# Altium PCB custom_line_V1.PcbDoc (part 1 of 2)
Units mm, origin at the board's own origin, x right, y up, seen from the top; angles counter-clockwise.
Board outline 111.2 x 38.5 mm, 2 copper layers (Top Layer, Bottom Layer); 243 components, 134 nets, 677 pads, 483 vias.
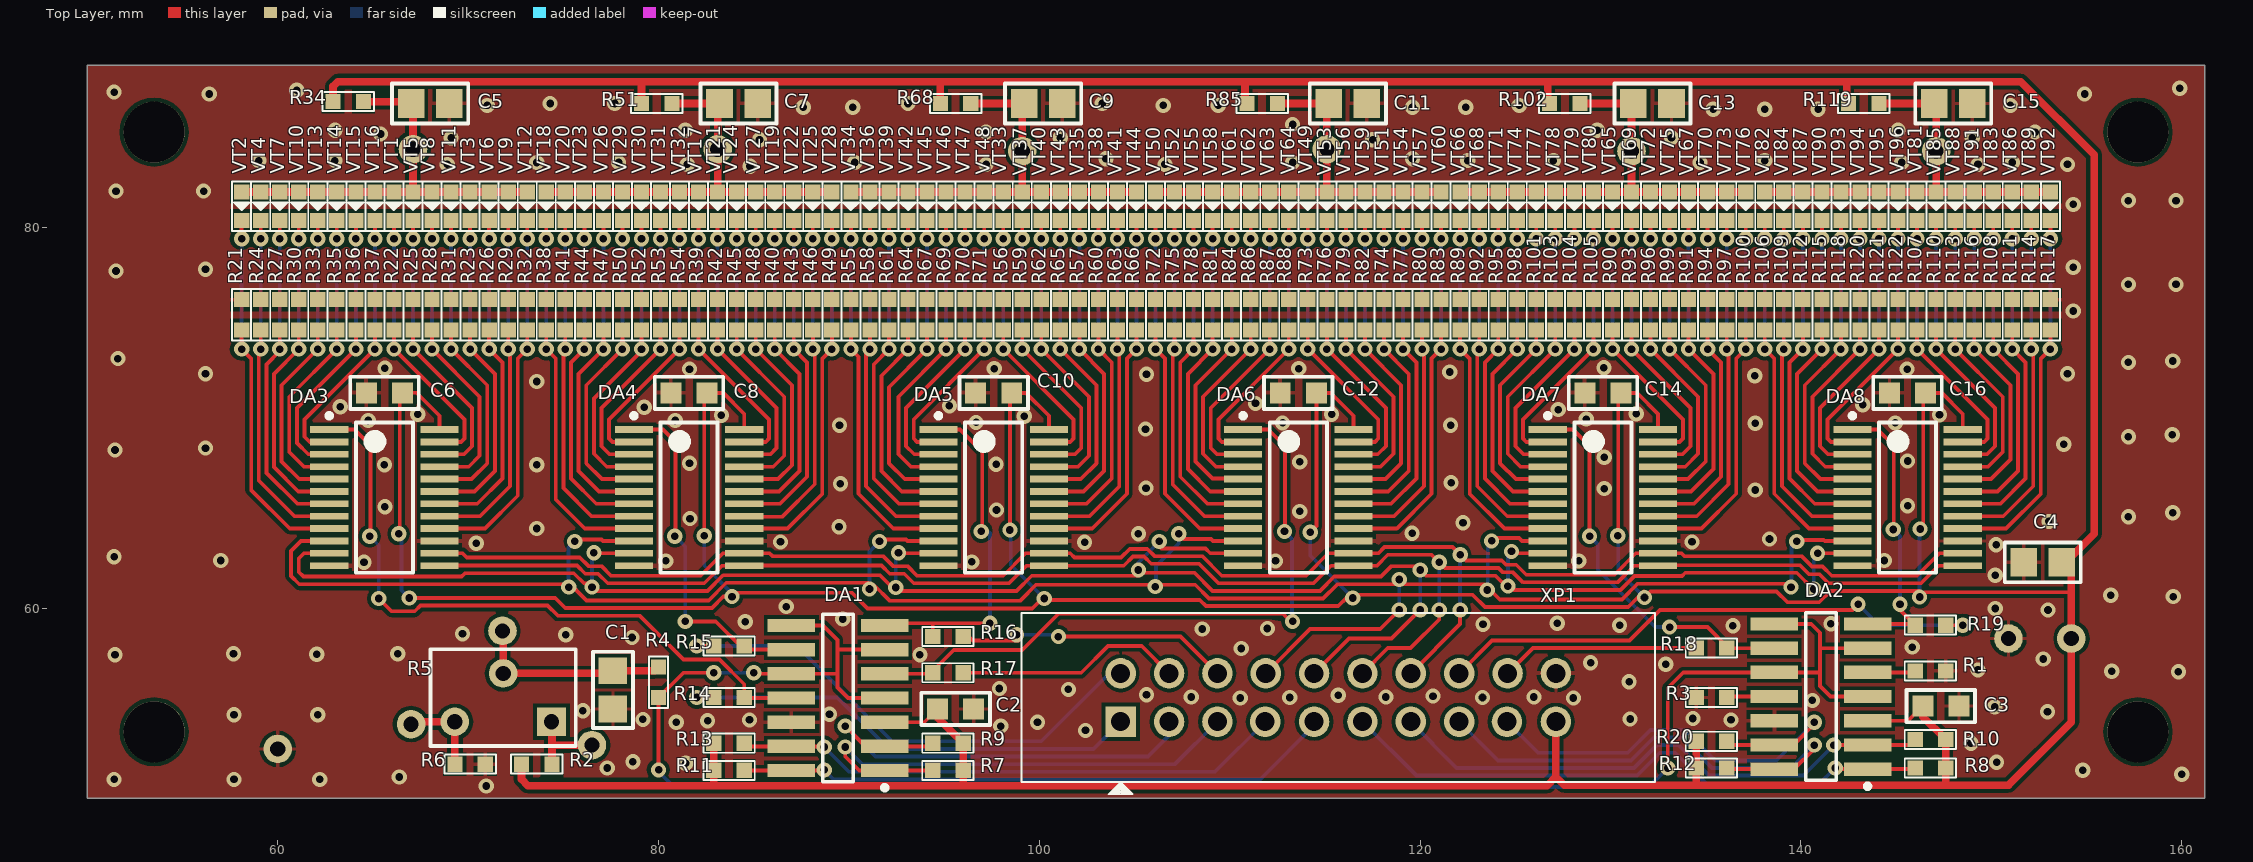
[diagram p0: Top Layer view]
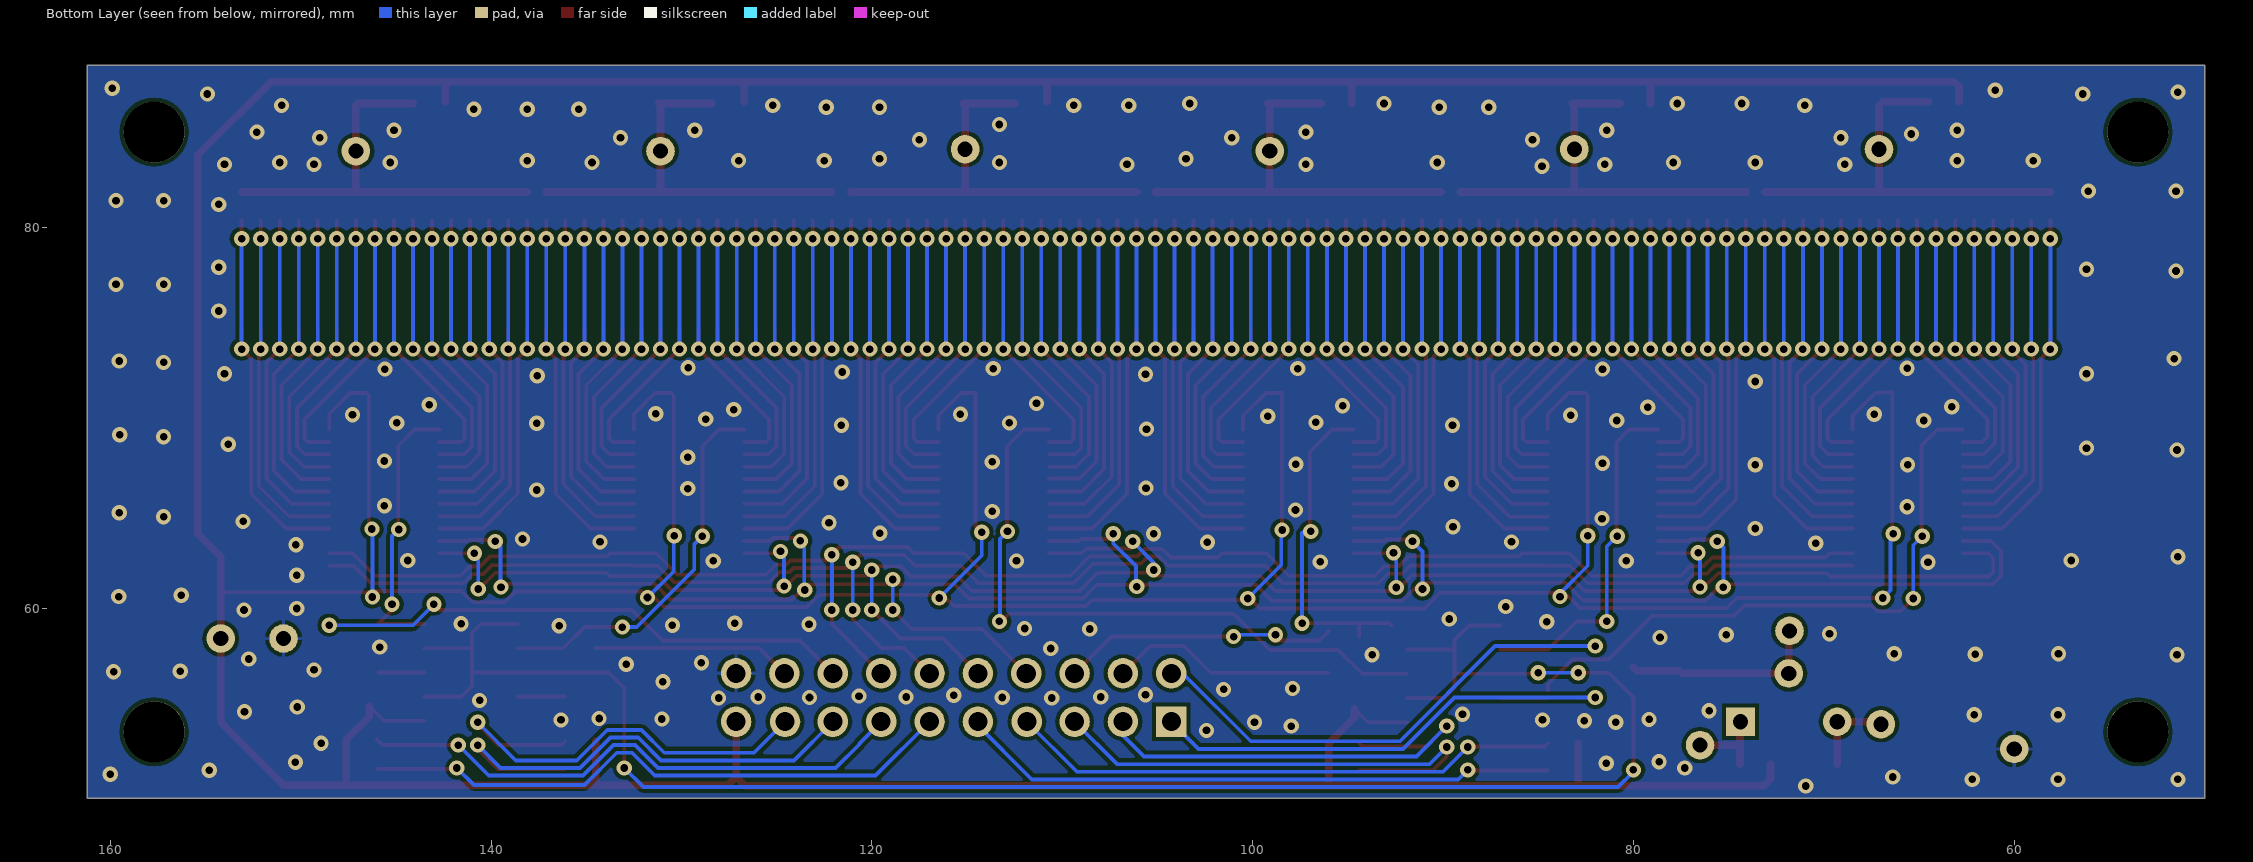
[diagram p1: Bottom Layer view, seen from below]
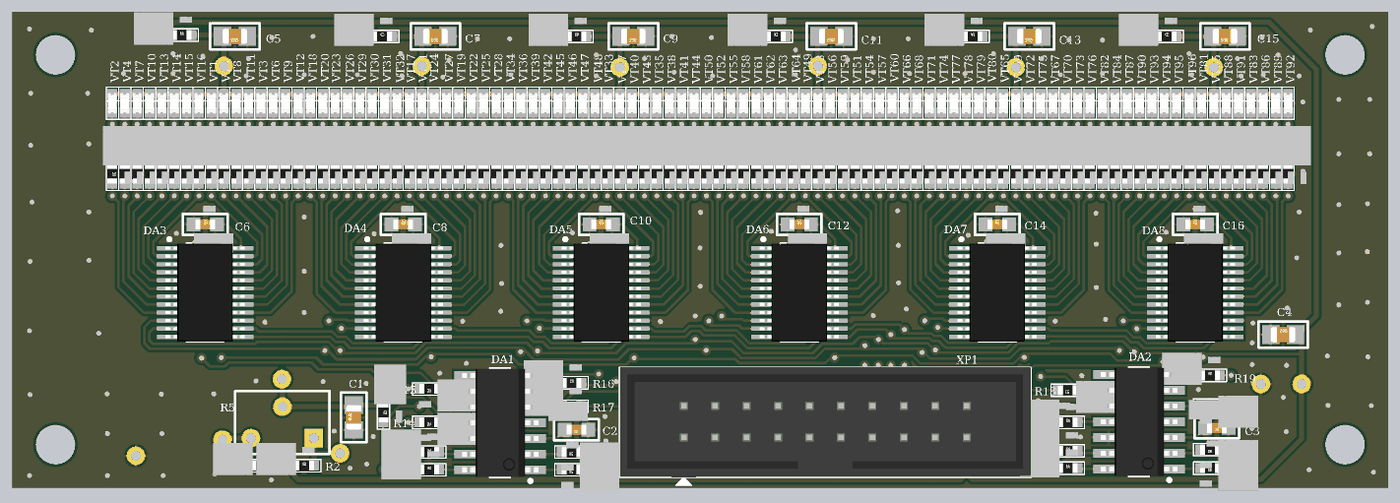
[diagram p3: 3D render of the assembled board from above, using the file's embedded part models]

## Layer stack, top to bottom
Top Layer: signal copper 0.0356
Dielectric: dielectric 0.32, FR-4, Dk 4.8
Bottom Layer: signal copper 0.0356

## Board outline
50,50 161.2,50 161.2,88.5 50,88.5

## Design rules (kind name [scope] priority, off if disabled: settings)
Clearance Clearance_1 [(InPadClass('<Nearby Pads>')) vs InPolygon] p1: gap=0.2
Clearance Clearance_nearby_pads [(InPadClass('<Nearby Pads>'))] p2: gap=0.1
Clearance [All] p3: gap=0.2
ComponentClearance [All] p1 off: gap=0.254 collisioncheckmode=3 verticalgap=0.254 showdistances=FALSE
HoleSize [All] p1: absolutevalues=TRUE maxlimit=4 minlimit=0.3 maxpercent=80.000 minpercent=20.000
HoleToHoleClearance [All] p1: gap=0.2 allowstackedmicrovias=TRUE
MinimumSolderMaskSliver [All] p1: minsoldermaskwidth=0.1
PolygonConnect PolygonConnect_1 [(InPadClass('New Class'))] p1: connectstyle=Relief reliefconductorwidth=0.2 reliefentries=4 polygonreliefangle="90 Angle" airgapwidth=0.2
PolygonConnect [All] p2: connectstyle=Direct reliefconductorwidth=0.2 reliefentries=4 polygonreliefangle="90 Angle" airgapwidth=0.2
RoutingVias [All] p1: holewidth=0.4 width=0.8 viastyle="Through Hole" minholewidth=0.4 minwidth=0.8 maxholewidth=0.4 maxwidth=0.8
SilkToSilkClearance [All] p1 off: silktosilkclearance=0.1
SilkToSolderMaskClearance [IsPad] p1 off: minsilkscreentomaskgap=0.1 clearancetoexposedcopper=TRUE
SolderMaskExpansion [All] p1: expansion=0.02
Width [All] p1: maxlimit=0.6 minlimit=0.2 preferedwidth=0.2
22 further rules are at their usual default settings.

## Classes and differential pairs
component class custom_line_V1_mux6: C15 C16 DA8 R106 R107 R108 R109 R110 R111 R112 R113 R114 R115 R116 R117 R118 R119 R120 R121 R122 VT81 VT82 VT83 VT84 VT85 VT86 VT87 VT88 VT89 VT90 VT91 VT92 VT93 VT94 VT95 VT96
component class custom_line_V1_mux5: 77 C13 C14 DA7 R89 R90 R91 R92 R93 R94 R95 R96 R97 R98 R99 R100 R102 R103 R104 R105 VT65 VT66 VT67 VT68 VT69 VT70 VT71 VT72 VT73 VT74 VT75 VT76 VT77 VT78 VT79 VT80
component class custom_line_V1_comp: C1 C2 C3 C4 DA1 DA2 R1 R2 R3 R4 R5 R6 R7 R8 R9 R10 R11 R12 R13 R14 R15 R16 R17 R18 R19 XP1
component class custom_line_V1_mux1: C5 DA3 R15 R16 R17 R18 R19 R26 R27 R28 R29 R30 R31 R32 R33 R34 R35 R36 R37 VT1 VT2 VT3 VT4 VT5 VT6 VT7 VT8 VT9 VT10 VT11 VT12 VT13 VT14 VT15 VT16
component class custom_line_V1_mux2: C7 C8 DA4 R38 R39 R40 R41 R42 R43 R44 R45 R46 R47 R48 R49 R50 R51 R52 R53 R54 VT17 VT18 VT19 VT20 VT21 VT22 VT23 VT24 VT25 VT26 VT27 VT28 VT29 VT30 VT31 VT32
component class custom_line_V1_mux3: C9 C10 DA5 R55 R56 R57 R58 R59 R60 R61 R62 R63 R64 R65 R66 R67 R68 R69 R70 R71 VT33 VT34 VT35 VT36 VT37 VT38 VT39 VT40 VT41 VT42 VT43 VT44 VT45 VT46 VT47 VT48
component class custom_line_V1_mux4: C11 C12 DA6 R72 R73 R74 R75 R76 R77 R78 R79 R80 R81 R82 R83 R84 R85 R86 R87 R88 VT49 VT50 VT51 VT52 VT53 VT54 VT55 VT56 VT57 VT58 VT59 VT60 VT61 VT62 VT63 VT64
pad class "<Nearby Pads>": R20-1 R20-2 R21-1 R21-2 R22-1 R22-2 R23-1 R23-2 R24-1 R24-2 R25-1 R25-2 R26-1 R26-2 R27-1 R27-2 R28-1 R28-2 R29-1 R29-2 R30-1 R30-2 R31-1 R31-2 R32-1 R32-2 R33-1 R33-2 R34-1 R34-2 R35-1 R35-2 R36-1 R36-2 R37-1 R37-2 R38-1 R38-2 R39-1 R39-2 R40-1 R40-2 R41-1 R41-2 R42-1 R42-2 R43-1 R43-2 R44-1 R44-2 R45-1 R45-2 R46-1 R46-2 R47-1 R47-2 R48-1 R48-2 R49-1 R49-2 R50-1 R50-2 R51-1 R51-2 R52-1 R52-2 R53-1 R53-2 R54-1 R54-2 R55-1 R55-2 R56-1 R56-2 R57-1 R57-2 R58-1 R58-2 R59-1 R59-2 R60-1 R60-2 R61-1 R61-2 R62-1 R62-2 R63-1 R63-2 R64-1 R64-2 R65-1 R65-2 R66-1 R66-2 R67-1 R67-2 R68-1 R68-2 R69-1 R69-2 R70-1 R70-2 R71-1 R71-2 R72-1 R72-2 R73-1 R73-2 R74-1 R74-2 R75-1 R75-2 R76-1 R76-2 R77-1 R77-2 R78-1 R78-2 R79-1 R79-2 R80-1 R80-2 R81-1 R81-2 R82-1 R82-2 R83-1 R83-2 R84-1 R84-2 R85-1 R85-2 R86-1 R86-2 R87-1 R87-2 R88-1 R88-2 R89-1 R89-2 R90-1 R90-2 R91-1 R91-2 R92-1 R92-2 R93-1 R93-2 R94-1 R94-2 R95-1 R95-2 R96-1 R96-2 R97-1 R97-2 R98-1 R98-2 R99-1 R99-2 R100-1 R100-2 R101-1 R101-2 R102-1 R102-2 R103-1 R103-2 R104-1 R104-2 R105-1 R105-2 R106-1 R106-2 R107-1 R107-2 R108-1 R108-2 R109-1 R109-2 R110-1 R110-2 R111-1 R111-2 R112-1 R112-2 R113-1 R113-2 R114-1 R114-2 R115-1 R115-2 R116-1 R116-2 R117-1 R117-2 R118-1 R118-2 R119-1 R119-2 R120-1 R120-2 R121-1 R121-2 R122-1 R122-2 VT1-1 VT1-2 VT2-1 VT2-2 VT3-1 VT3-2 VT4-1 VT4-2 VT5-1 VT5-2 VT6-1 VT6-2 VT7-1 VT7-2 VT8-1 VT8-2 VT9-1 VT9-2 VT10-1 VT10-2 VT11-1 VT11-2 VT12-1 VT12-2 VT13-1 VT13-2 VT14-1 VT14-2 VT15-1 VT15-2 VT16-1 VT16-2 VT17-1 VT17-2 VT18-1 VT18-2 VT19-1 VT19-2 VT20-1 VT20-2 VT21-1 VT21-2 VT22-1 VT22-2 VT23-1 VT23-2 VT24-1 VT24-2 VT25-1 VT25-2 VT26-1 VT26-2 VT27-1 VT27-2 VT28-1 VT28-2 VT29-1 VT29-2 VT30-1 VT30-2 VT31-1 VT31-2 VT32-1 VT32-2 VT33-1 VT33-2 VT34-1 VT34-2 VT35-1 VT35-2 VT36-1 VT36-2 VT37-1 VT37-2 VT38-1 VT38-2 VT39-1 VT39-2 VT40-1 VT40-2 VT41-1 VT41-2 VT42-1 VT42-2 VT43-1 VT43-2 VT44-1 VT44-2 VT45-1 VT45-2 VT46-1 VT46-2 VT47-1 VT47-2 VT48-1 VT48-2 VT49-1 VT49-2 VT50-1 VT50-2 VT51-1 VT51-2 VT52-1 VT52-2 VT53-1 VT53-2 VT54-1 VT54-2 VT55-1 VT55-2 VT56-1 VT56-2 VT57-1 VT57-2 VT58-1 VT58-2 VT59-1 VT59-2 VT60-1 VT60-2 VT61-1 VT61-2 VT62-1 VT62-2 VT63-1 VT63-2 VT64-1 VT64-2 VT65-1 VT65-2 VT66-1 VT66-2 VT67-1 VT67-2 VT68-1 VT68-2 VT69-1 VT69-2 VT70-1 VT70-2 VT71-1 VT71-2 VT72-1 VT72-2 VT73-1 VT73-2 VT74-1 VT74-2 VT75-1 VT75-2 VT76-1 VT76-2 VT77-1 VT77-2 VT78-1 VT78-2 VT79-1 VT79-2 VT80-1 VT80-2 VT81-1 VT81-2 VT82-1 VT82-2 VT83-1 VT83-2 VT84-1 VT84-2 VT85-1 VT85-2 VT86-1 VT86-2 VT87-1 VT87-2 VT88-1 VT88-2 VT89-1 VT89-2 VT90-1 VT90-2 VT91-1 VT91-2 VT92-1 VT92-2 VT93-1 VT93-2 VT94-1 VT94-2 VT95-1 VT95-2 VT96-1 VT96-2
pad class "New Class": C1-1 C1-2 C2-1 C2-2 C3-1 C3-2 C4-1 C4-2 C5-1 C5-2 C6-1 C6-2 C7-1 C7-2 C8-1 C8-2 C9-1 C9-2 C10-1 C10-2 C11-1 C11-2 C12-1 C12-2 C13-1 C13-2 C14-1 C14-2 C15-1 C15-2 C16-1 C16-2 DA1-1 DA1-2 DA1-3 DA1-4 DA1-5 DA1-6 DA1-7 DA1-8 DA1-9 DA1-10 DA1-11 DA1-12 DA1-13 DA1-14 DA2-1 DA2-2 DA2-3 DA2-4 DA2-5 DA2-6 DA2-7 DA2-8 DA2-9 DA2-10 DA2-11 DA2-12 DA2-13 DA2-14 DA3-1 DA3-2 DA3-3 DA3-4 DA3-5 DA3-6 DA3-7 DA3-8 DA3-9 DA3-10 DA3-11 DA3-12 DA3-13 DA3-14 DA3-15 DA3-16 DA3-17 DA3-18 DA3-19 DA3-20 DA3-21 DA3-22 DA3-23 DA3-24 DA4-1 DA4-2 DA4-3 DA4-4 DA4-5 DA4-6 DA4-7 DA4-8 DA4-9 DA4-10 DA4-11 DA4-12 DA4-13 DA4-14 DA4-15 DA4-16 DA4-17 DA4-18 DA4-19 DA4-20 DA4-21 DA4-22 DA4-23 DA4-24 DA5-1 DA5-2 DA5-3 DA5-4 DA5-5 DA5-6 DA5-7 DA5-8 DA5-9 DA5-10 DA5-11 DA5-12 DA5-13 DA5-14 DA5-15 DA5-16 DA5-17 DA5-18 DA5-19 DA5-20 DA5-21 DA5-22 DA5-23 DA5-24 DA6-1 DA6-2 DA6-3 DA6-4 DA6-5 DA6-6 DA6-7 DA6-8 DA6-9 DA6-10 DA6-11 DA6-12 DA6-13 DA6-14 DA6-15 DA6-16 DA6-17 DA6-18 DA6-19 DA6-20 DA6-21 DA6-22 DA6-23 DA6-24 DA7-1 DA7-2 DA7-3 DA7-4 DA7-5 DA7-6 DA7-7 DA7-8 DA7-9 DA7-10 DA7-11 DA7-12 DA7-13 DA7-14 DA7-15 DA7-16 DA7-17 DA7-18 DA7-19 DA7-20 DA7-21 DA7-22 DA7-23 DA7-24 DA8-1 DA8-2 DA8-3 DA8-4 DA8-5 DA8-6 DA8-7 DA8-8 DA8-9 DA8-10 DA8-11 DA8-12 DA8-13 DA8-14 DA8-15 DA8-16 DA8-17 DA8-18 DA8-19 DA8-20 DA8-21 DA8-22 DA8-23 DA8-24 Free-0 Free-1 Free-2 Free-3 Free-4 Free-5 Free-6 Free-7 Free-8 Free-11 Free-12 Free-13 Free-M0 Free-M1 Free-M2 Free-M3 R1-1 R1-2 R2-1 R2-2 R3-1 R3-2 R4-1 R4-2 R5-1 R5-2 R5-3 R6-1 R6-2 R7-1 R7-2 R8-1 R8-2 R9-1 R9-2 R10-1 R10-2 R11-1 R11-2 R12-1 R12-2 R13-1 R13-2 R14-1 R14-2 R15-1 R15-2 R16-1 R16-2 R17-1 R17-2 R18-1 R18-2 R19-1 R19-2 R20-1 R20-2 R21-1 R21-2 R22-1 R22-2 R23-1 R23-2 R24-1 R24-2 R25-1 R25-2 R26-1 R26-2 R27-1 R27-2 R28-1 R28-2 R29-1 R29-2 R30-1 R30-2 R31-1 R31-2 R32-1 R32-2 R33-1 R33-2 R34-1 R34-2 R35-1 R35-2 R36-1 R36-2 R37-1 R37-2 R38-1 R38-2 R39-1 R39-2 R40-1 R40-2 R41-1 R41-2 R42-1 R42-2 R43-1 R43-2 R44-1 R44-2 R45-1 R45-2 R46-1 R46-2 R47-1 R47-2 R48-1 R48-2 R49-1 R49-2 R50-1 R50-2 R51-1 R51-2 R52-1 R52-2 R53-1 R53-2 R54-1 R54-2 R55-1 R55-2 R56-1 R56-2 R57-1 R57-2 R58-1 R58-2 R59-1 R59-2 R60-1 R60-2 R61-1 R61-2 R62-1 R62-2 R63-1 R63-2 R64-1 R64-2 R65-1 R65-2 R66-1 R66-2 R67-1 R67-2 R68-1 R68-2 R69-1 R69-2 R70-1 R70-2 R71-1 R71-2 R72-1 R72-2 R73-1 R73-2 R74-1 R74-2 R75-1 R75-2 R76-1 R76-2 R77-1 R77-2 R78-1 R78-2 R79-1 R79-2 R80-1 R80-2 R81-1 R81-2 R82-1 R82-2 R83-1 R83-2 R84-1 R84-2 R85-1 R85-2 R86-1 R86-2 R87-1 R87-2 R88-1 R88-2 R89-1 R89-2 R90-1 R90-2 R91-1 R91-2 R92-1 R92-2 R93-1 R93-2 R94-1 R94-2 R95-1 R95-2 R96-1 R96-2 R97-1 R97-2 R98-1 R98-2 R99-1 R99-2 R100-1 R100-2 R101-1 R101-2 R102-1 R102-2 R103-1 R103-2 R104-1 R104-2 R105-1 R105-2 R106-1 R106-2 R107-1 R107-2 R108-1 R108-2 R109-1 R109-2 R110-1 R110-2 R111-1 R111-2 R112-1 R112-2 R113-1 R113-2 R114-1 R114-2 R115-1 R115-2 R116-1 R116-2 R117-1 R117-2 R118-1 R118-2 R119-1 R119-2 R120-1 R120-2 R121-1 R121-2 R122-1 R122-2 VT1-1 VT1-2 VT2-1 VT2-2 VT3-1 VT3-2 VT4-1 VT4-2 VT5-1 VT5-2 VT6-1 VT6-2 VT7-1 VT7-2 VT8-1 VT8-2 VT9-1 VT9-2 VT10-1 VT10-2 VT11-1 VT11-2 VT12-1 VT12-2 VT13-1 VT13-2 VT14-1 VT14-2 VT15-1 VT15-2 VT16-1 VT16-2 VT17-1 VT17-2 VT18-1 VT18-2 VT19-1 VT19-2 VT20-1 VT20-2 VT21-1 VT21-2 VT22-1 VT22-2 VT23-1 VT23-2 VT24-1 VT24-2 VT25-1 VT25-2 VT26-1 VT26-2 VT27-1 VT27-2 VT28-1 VT28-2 VT29-1 VT29-2 VT30-1 VT30-2 VT31-1 VT31-2 VT32-1 VT32-2 VT33-1 VT33-2 VT34-1 VT34-2 VT35-1 VT35-2 VT36-1 VT36-2 VT37-1 VT37-2 VT38-1 VT38-2 VT39-1 VT39-2 VT40-1 VT40-2 VT41-1 VT41-2 VT42-1 VT42-2 VT43-1 VT43-2 VT44-1 VT44-2 VT45-1 VT45-2 VT46-1 VT46-2 VT47-1 VT47-2 VT48-1 VT48-2 VT49-1 VT49-2 VT50-1 VT50-2 VT51-1 VT51-2 VT52-1 VT52-2 VT53-1 VT53-2 VT54-1 VT54-2 VT55-1 VT55-2 VT56-1 VT56-2 VT57-1 VT57-2 VT58-1 VT58-2 VT59-1 VT59-2 VT60-1 VT60-2 VT61-1 VT61-2 VT62-1 VT62-2 VT63-1 VT63-2 VT64-1 VT64-2 VT65-1 VT65-2 VT66-1 VT66-2 VT67-1 VT67-2 VT68-1 VT68-2 VT69-1 VT69-2 VT70-1 VT70-2 VT71-1 VT71-2 VT72-1 VT72-2 VT73-1 VT73-2 VT74-1 VT74-2 VT75-1 VT75-2 VT76-1 VT76-2 VT77-1 VT77-2 VT78-1 VT78-2 VT79-1 VT79-2 VT80-1 VT80-2 VT81-1 VT81-2 VT82-1 VT82-2 VT83-1 VT83-2 VT84-1 VT84-2 VT85-1 VT85-2 VT86-1 VT86-2 VT87-1 VT87-2 VT88-1 VT88-2 VT89-1 VT89-2 VT90-1 VT90-2 VT91-1 VT91-2 VT92-1 VT92-2 VT93-1 VT93-2 VT94-1 VT94-2 VT95-1 VT95-2 VT96-1 VT96-2 XP1-1 XP1-2 XP1-3 XP1-4 XP1-5 XP1-6 XP1-7 XP1-8 XP1-9 XP1-10 XP1-11 XP1-12 XP1-13 XP1-14 XP1-15 XP1-16 XP1-17 XP1-18 XP1-19 XP1-20

## Components (designator, comment, footprint, x,y, rotation, side; value= is the part's Value field where it differs from the comment)
C1 "10" CC_0805 77.6,55.7 r90 top
C2 "0.1" CC_0603 95.6,54.7 r180 top
C3 "0.1" CC_0603 147.35,54.85 r180 top
C4 "10" CC_0805 152.7,62.4 r0 top
C5 "10" CC_0805 68,86.5 r180 top
C6 "0.1" CC_0603 65.6,71.3 r0 top
C7 "10" CC_0805 84.2,86.5 r180 top
C8 "0.1" CC_0603 81.6,71.3 r0 top
C9 "10" CC_0805 100.2,86.5 r180 top
C10 "0.1" CC_0603 97.6,71.3 r0 top
C11 "10" CC_0805 116.2,86.5 r180 top
C12 "0.1" CC_0603 113.6,71.3 r0 top
C13 "10" CC_0805 132.2,86.5 r180 top
C14 "0.1" CC_0603 129.6,71.3 r0 top
C15 "10" CC_0805 148,86.5 r180 top
C16 "0.1" CC_0603 145.6,71.3 r0 top
DA1 "TLC374CD" SOIC-14 89.425,55.275 r180 top
DA2 "TLC374CD" SOIC-14 141.05,55.35 r180 top
DA3 "74HC4067PW" TSSOP-24 65.6,65.8 r0 top
DA4 "74HC4067PW" TSSOP-24 81.6,65.8 r0 top
DA5 "74HC4067PW" TSSOP-24 97.6,65.8 r0 top
DA6 "74HC4067PW" TSSOP-24 113.6,65.8 r0 top
DA7 "74HC4067PW" TSSOP-24 129.6,65.8 r0 top
DA8 "74HC4067PW" TSSOP-24 145.6,65.8 r0 top
R1 "10K" RC_0603_SMALL 146.8,56.7 r180 top
R2 "1K" RC_0603_SMALL 73.6,51.8 r0 top
R3 "10K" RC_0603_SMALL 135.3,55.3 r0 top
R4 "10K" RC_0603_SMALL 80,56.1 r270 top
R5 "10K" Res_3266W 74.375,54.025 r180 top
R6 "1K" RC_0603_SMALL 70.1,51.8 r0 top
R7 "10K" RC_0603_SMALL 95.2,51.475 r180 top
R8 "10K" RC_0603_SMALL 146.8,51.6 r180 top
R9 "10K" RC_0603_SMALL 95.2,52.9 r180 top
R10 "10K" RC_0603_SMALL 146.8,53.1 r180 top
R11 "10K" RC_0603_SMALL 83.7,51.475 r0 top
R12 "10K" RC_0603_SMALL 135.3,51.6 r0 top
R13 "10K" RC_0603_SMALL 83.7,52.9 r0 top
R14 "0" RC_0603_SMALL 83.7,55.3 r180 top
R15 "0" RC_0603_SMALL 83.7,58 r180 top
R16 "0" RC_0603_SMALL 95.2,58.5 r0 top
R17 "0" RC_0603_SMALL 95.2,56.6 r0 top
R18 "0" RC_0603_SMALL 135.3,57.9 r180 top
R19 "0" RC_0603_SMALL 146.8,59.1 r0 top
R20 "10K" RC_0603_SMALL 135.3,53 r0 top
R21 "1.8K" RC_0603_SMALL 58.1,75.4 r270 top
R22 "1.8K" RC_0603_SMALL 66.1,75.4 r270 top
R23 "1.8K" RC_0603_SMALL 70.1,75.4 r270 top
R24 "1.8K" RC_0603_SMALL 59.1,75.4 r270 top
R25 "1.8K" RC_0603_SMALL 67.1,75.4 r270 top
R26 "1.8K" RC_0603_SMALL 71.1,75.4 r270 top
R27 "1.8K" RC_0603_SMALL 60.1,75.4 r270 top
R28 "1.8K" RC_0603_SMALL 68.1,75.4 r270 top
R29 "1.8K" RC_0603_SMALL 72.1,75.4 r270 top
R30 "1.8K" RC_0603_SMALL 61.1,75.4 r270 top
R31 "1.8K" RC_0603_SMALL 69.1,75.4 r270 top
R32 "1.8K" RC_0603_SMALL 73.1,75.4 r270 top
R33 "1.8K" RC_0603_SMALL 62.1,75.4 r270 top
R34 "10" RC_0603_SMALL 63.7,86.6 r0 top
R35 "1.8K" RC_0603_SMALL 63.1,75.4 r270 top
R36 "1.8K" RC_0603_SMALL 64.1,75.4 r270 top
R37 "1.8K" RC_0603_SMALL 65.1,75.4 r270 top
R38 "1.8K" RC_0603_SMALL 74.1,75.4 r270 top
R39 "1.8K" RC_0603_SMALL 82.1,75.4 r270 top
R40 "1.8K" RC_0603_SMALL 86.1,75.4 r270 top
R41 "1.8K" RC_0603_SMALL 75.1,75.4 r270 top
R42 "1.8K" RC_0603_SMALL 83.1,75.4 r270 top
R43 "1.8K" RC_0603_SMALL 87.1,75.4 r270 top
R44 "1.8K" RC_0603_SMALL 76.1,75.4 r270 top
R45 "1.8K" RC_0603_SMALL 84.1,75.4 r270 top
R46 "1.8K" RC_0603_SMALL 88.1,75.4 r270 top
R47 "1.8K" RC_0603_SMALL 77.1,75.4 r270 top
R48 "1.8K" RC_0603_SMALL 85.1,75.4 r270 top
R49 "1.8K" RC_0603_SMALL 89.1,75.4 r270 top
R50 "1.8K" RC_0603_SMALL 78.1,75.4 r270 top
R51 "10" RC_0603_SMALL 79.9,86.5 r0 top
R52 "1.8K" RC_0603_SMALL 79.1,75.4 r270 top
R53 "1.8K" RC_0603_SMALL 80.1,75.4 r270 top
R54 "1.8K" RC_0603_SMALL 81.1,75.4 r270 top
R55 "1.8K" RC_0603_SMALL 90.1,75.4 r270 top
R56 "1.8K" RC_0603_SMALL 98.1,75.4 r270 top
R57 "1.8K" RC_0603_SMALL 102.1,75.4 r270 top
R58 "1.8K" RC_0603_SMALL 91.1,75.4 r270 top
R59 "1.8K" RC_0603_SMALL 99.1,75.4 r270 top
R60 "1.8K" RC_0603_SMALL 103.1,75.4 r270 top
R61 "1.8K" RC_0603_SMALL 92.1,75.4 r270 top
R62 "1.8K" RC_0603_SMALL 100.1,75.4 r270 top
R63 "1.8K" RC_0603_SMALL 104.1,75.4 r270 top
R64 "1.8K" RC_0603_SMALL 93.1,75.4 r270 top
R65 "1.8K" RC_0603_SMALL 101.1,75.4 r270 top
R66 "1.8K" RC_0603_SMALL 105.1,75.4 r270 top
R67 "1.8K" RC_0603_SMALL 94.1,75.4 r270 top
R68 "10" RC_0603_SMALL 95.6,86.5 r0 top
R69 "1.8K" RC_0603_SMALL 95.1,75.4 r270 top
R70 "1.8K" RC_0603_SMALL 96.1,75.4 r270 top
R71 "1.8K" RC_0603_SMALL 97.1,75.4 r270 top
R72 "1.8K" RC_0603_SMALL 106.1,75.4 r270 top
R73 "1.8K" RC_0603_SMALL 114.1,75.4 r270 top
R74 "1.8K" RC_0603_SMALL 118.1,75.4 r270 top
R75 "1.8K" RC_0603_SMALL 107.1,75.4 r270 top
R76 "1.8K" RC_0603_SMALL 115.1,75.4 r270 top
R77 "1.8K" RC_0603_SMALL 119.1,75.4 r270 top
R78 "1.8K" RC_0603_SMALL 108.1,75.4 r270 top
R79 "1.8K" RC_0603_SMALL 116.1,75.4 r270 top
R80 "1.8K" RC_0603_SMALL 120.1,75.4 r270 top
R81 "1.8K" RC_0603_SMALL 109.1,75.4 r270 top
R82 "1.8K" RC_0603_SMALL 117.1,75.4 r270 top
R83 "1.8K" RC_0603_SMALL 121.1,75.4 r270 top
R84 "1.8K" RC_0603_SMALL 110.1,75.4 r270 top
R85 "10" RC_0603_SMALL 111.7,86.5 r0 top
R86 "1.8K" RC_0603_SMALL 111.1,75.4 r270 top
R87 "1.8K" RC_0603_SMALL 112.1,75.4 r270 top
R88 "1.8K" RC_0603_SMALL 113.1,75.4 r270 top
R89 "1.8K" RC_0603_SMALL 122.1,75.4 r270 top
R90 "1.8K" RC_0603_SMALL 130.1,75.4 r270 top
R91 "1.8K" RC_0603_SMALL 134.1,75.4 r270 top
R92 "1.8K" RC_0603_SMALL 123.1,75.4 r270 top
R93 "1.8K" RC_0603_SMALL 131.1,75.4 r270 top
R94 "1.8K" RC_0603_SMALL 135.1,75.4 r270 top
R95 "1.8K" RC_0603_SMALL 124.1,75.4 r270 top
R96 "1.8K" RC_0603_SMALL 132.1,75.4 r270 top
R97 "1.8K" RC_0603_SMALL 136.1,75.4 r270 top
R98 "1.8K" RC_0603_SMALL 125.1,75.4 r270 top
R99 "1.8K" RC_0603_SMALL 133.1,75.4 r270 top
R100 "1.8K" RC_0603_SMALL 137.1,75.4 r270 top
R101 "1.8K" RC_0603_SMALL 126.1,75.4 r270 top
R102 "10" RC_0603_SMALL 127.6,86.5 r0 top
R103 "1.8K" RC_0603_SMALL 127.1,75.4 r270 top
R104 "1.8K" RC_0603_SMALL 128.1,75.4 r270 top
R105 "1.8K" RC_0603_SMALL 129.1,75.4 r270 top
R106 "1.8K" RC_0603_SMALL 138.1,75.4 r270 top
R107 "1.8K" RC_0603_SMALL 146.1,75.4 r270 top
R108 "1.8K" RC_0603_SMALL 150.1,75.4 r270 top
R109 "1.8K" RC_0603_SMALL 139.1,75.4 r270 top
R110 "1.8K" RC_0603_SMALL 147.1,75.4 r270 top
R111 "1.8K" RC_0603_SMALL 151.1,75.4 r270 top
R112 "1.8K" RC_0603_SMALL 140.1,75.4 r270 top
R113 "1.8K" RC_0603_SMALL 148.1,75.4 r270 top
R114 "1.8K" RC_0603_SMALL 152.1,75.4 r270 top
R115 "1.8K" RC_0603_SMALL 141.1,75.4 r270 top
R116 "1.8K" RC_0603_SMALL 149.1,75.4 r270 top
R117 "1.8K" RC_0603_SMALL 153.1,75.4 r270 top
R118 "1.8K" RC_0603_SMALL 142.1,75.4 r270 top
R119 "10" RC_0603_SMALL 143.3,86.5 r0 top
R120 "1.8K" RC_0603_SMALL 143.1,75.4 r270 top
R121 "1.8K" RC_0603_SMALL 144.1,75.4 r270 top
R122 "1.8K" RC_0603_SMALL 145.1,75.4 r270 top
VT1 "IN-S63DTPT" LED_0603 66.1,81.1 r270 top
VT2 "IN-S63DTPT" LED_0603 58.1,81.1 r270 top
VT3 "IN-S63DTPT" LED_0603 70.1,81.1 r270 top
VT4 "IN-S63DTPT" LED_0603 59.1,81.1 r270 top
VT5 "IN-S63DTPT" LED_0603 67.1,81.1 r270 top
VT6 "IN-S63DTPT" LED_0603 71.1,81.1 r270 top
VT7 "IN-S63DTPT" LED_0603 60.1,81.1 r270 top
VT8 "IN-S63DTPT" LED_0603 68.1,81.1 r270 top
VT9 "IN-S63DTPT" LED_0603 72.1,81.1 r270 top
VT10 "IN-S63DTPT" LED_0603 61.1,81.1 r270 top
VT11 "IN-S63DTPT" LED_0603 69.1,81.1 r270 top
VT12 "IN-S63DTPT" LED_0603 73.1,81.1 r270 top
VT13 "IN-S63DTPT" LED_0603 62.1,81.1 r270 top
VT14 "IN-S63DTPT" LED_0603 63.1,81.1 r270 top
VT15 "IN-S63DTPT" LED_0603 64.1,81.1 r270 top
VT16 "IN-S63DTPT" LED_0603 65.1,81.1 r270 top
VT17 "IN-S63DTPT" LED_0603 82.1,81.1 r270 top
VT18 "IN-S63DTPT" LED_0603 74.1,81.1 r270 top
VT19 "IN-S63DTPT" LED_0603 86.1,81.1 r270 top
VT20 "IN-S63DTPT" LED_0603 75.1,81.1 r270 top
VT21 "IN-S63DTPT" LED_0603 83.1,81.1 r270 top
VT22 "IN-S63DTPT" LED_0603 87.1,81.1 r270 top
VT23 "IN-S63DTPT" LED_0603 76.1,81.1 r270 top
VT24 "IN-S63DTPT" LED_0603 84.1,81.1 r270 top
VT25 "IN-S63DTPT" LED_0603 88.1,81.1 r270 top
VT26 "IN-S63DTPT" LED_0603 77.1,81.1 r270 top
VT27 "IN-S63DTPT" LED_0603 85.1,81.1 r270 top
VT28 "IN-S63DTPT" LED_0603 89.1,81.1 r270 top
VT29 "IN-S63DTPT" LED_0603 78.1,81.1 r270 top
VT30 "IN-S63DTPT" LED_0603 79.1,81.1 r270 top
VT31 "IN-S63DTPT" LED_0603 80.1,81.1 r270 top
VT32 "IN-S63DTPT" LED_0603 81.1,81.1 r270 top
VT33 "IN-S63DTPT" LED_0603 98.1,81.1 r270 top
VT34 "IN-S63DTPT" LED_0603 90.1,81.1 r270 top
VT35 "IN-S63DTPT" LED_0603 102.1,81.1 r270 top
VT36 "IN-S63DTPT" LED_0603 91.1,81.1 r270 top
VT37 "IN-S63DTPT" LED_0603 99.1,81.1 r270 top
VT38 "IN-S63DTPT" LED_0603 103.1,81.1 r270 top
VT39 "IN-S63DTPT" LED_0603 92.1,81.1 r270 top
VT40 "IN-S63DTPT" LED_0603 100.1,81.1 r270 top
VT41 "IN-S63DTPT" LED_0603 104.1,81.1 r270 top
VT42 "IN-S63DTPT" LED_0603 93.1,81.1 r270 top
VT43 "IN-S63DTPT" LED_0603 101.1,81.1 r270 top
VT44 "IN-S63DTPT" LED_0603 105.1,81.1 r270 top
VT45 "IN-S63DTPT" LED_0603 94.1,81.1 r270 top
VT46 "IN-S63DTPT" LED_0603 95.1,81.1 r270 top
VT47 "IN-S63DTPT" LED_0603 96.1,81.1 r270 top
VT48 "IN-S63DTPT" LED_0603 97.1,81.1 r270 top
VT49 "IN-S63DTPT" LED_0603 114.1,81.1 r270 top
VT50 "IN-S63DTPT" LED_0603 106.1,81.1 r270 top
VT51 "IN-S63DTPT" LED_0603 118.1,81.1 r270 top
VT52 "IN-S63DTPT" LED_0603 107.1,81.1 r270 top
VT53 "IN-S63DTPT" LED_0603 115.1,81.1 r270 top
VT54 "IN-S63DTPT" LED_0603 119.1,81.1 r270 top
VT55 "IN-S63DTPT" LED_0603 108.1,81.1 r270 top
VT56 "IN-S63DTPT" LED_0603 116.1,81.1 r270 top
VT57 "IN-S63DTPT" LED_0603 120.1,81.1 r270 top
VT58 "IN-S63DTPT" LED_0603 109.1,81.1 r270 top
VT59 "IN-S63DTPT" LED_0603 117.1,81.1 r270 top
VT60 "IN-S63DTPT" LED_0603 121.1,81.1 r270 top
VT61 "IN-S63DTPT" LED_0603 110.1,81.1 r270 top
VT62 "IN-S63DTPT" LED_0603 111.1,81.1 r270 top
VT63 "IN-S63DTPT" LED_0603 112.1,81.1 r270 top
VT64 "IN-S63DTPT" LED_0603 113.1,81.1 r270 top
VT65 "IN-S63DTPT" LED_0603 130.1,81.1 r270 top
VT66 "IN-S63DTPT" LED_0603 122.1,81.1 r270 top
VT67 "IN-S63DTPT" LED_0603 134.1,81.1 r270 top
VT68 "IN-S63DTPT" LED_0603 123.1,81.1 r270 top
VT69 "IN-S63DTPT" LED_0603 131.1,81.1 r270 top
VT70 "IN-S63DTPT" LED_0603 135.1,81.1 r270 top
VT71 "IN-S63DTPT" LED_0603 124.1,81.1 r270 top
VT72 "IN-S63DTPT" LED_0603 132.1,81.1 r270 top
VT73 "IN-S63DTPT" LED_0603 136.1,81.1 r270 top
VT74 "IN-S63DTPT" LED_0603 125.1,81.1 r270 top
VT75 "IN-S63DTPT" LED_0603 133.1,81.1 r270 top
VT76 "IN-S63DTPT" LED_0603 137.1,81.1 r270 top
VT77 "IN-S63DTPT" LED_0603 126.1,81.1 r270 top
VT78 "IN-S63DTPT" LED_0603 127.1,81.1 r270 top
VT79 "IN-S63DTPT" LED_0603 128.1,81.1 r270 top
VT80 "IN-S63DTPT" LED_0603 129.1,81.1 r270 top
VT81 "IN-S63DTPT" LED_0603 146.1,81.1 r270 top
VT82 "IN-S63DTPT" LED_0603 138.1,81.1 r270 top
VT83 "IN-S63DTPT" LED_0603 150.1,81.1 r270 top
VT84 "IN-S63DTPT" LED_0603 139.1,81.1 r270 top
VT85 "IN-S63DTPT" LED_0603 147.1,81.1 r270 top
VT86 "IN-S63DTPT" LED_0603 151.1,81.1 r270 top
VT87 "IN-S63DTPT" LED_0603 140.1,81.1 r270 top
VT88 "IN-S63DTPT" LED_0603 148.1,81.1 r270 top
VT89 "IN-S63DTPT" LED_0603 152.1,81.1 r270 top
VT90 "IN-S63DTPT" LED_0603 141.1,81.1 r270 top
VT91 "IN-S63DTPT" LED_0603 149.1,81.1 r270 top
VT92 "IN-S63DTPT" LED_0603 153.1,81.1 r270 top
VT93 "IN-S63DTPT" LED_0603 142.1,81.1 r270 top
VT94 "IN-S63DTPT" LED_0603 143.1,81.1 r270 top
VT95 "IN-S63DTPT" LED_0603 144.1,81.1 r270 top
VT96 "IN-S63DTPT" LED_0603 145.1,81.1 r270 top
XP1 "IDC-20SM" IDC-20SM 115.7,55.3 r0 top

## Footprints (in the part's own frame and the unit in brackets; to place one, negate y for a bottom-side part, rotate by r counter-clockwise, add the part's x,y. Pads: shape width x height; smd on the part's side, far side on the other; paste and mask are expansions set on the pad)
CC_0603 [mm]
  rect 1.1x1.1 smd: 1(-0.95,0) 2(0.95,0)
  silkscreen extent -1.8,-0.85 1.8,0.85, body extent -0.8,-1.57 0.8,1.27, height 0.3
CC_0805 [mm]
  rect 1.4x1.5 smd: 1(-1,0) 2(1,0)
  silkscreen extent -2,-1.05 2,1.05, body extent -1,-0.63 1,0.62, height 0.78
IDC-20SM [mm]
  rect 1.6x1.6 hole 1: 1(-11.43,-1.27)
  round 1.6 hole 1: 2(-11.43,1.27) 3(-8.89,-1.27) 4(-8.89,1.27) 5(-6.35,-1.27) 6(-6.35,1.27) 7(-3.84,-1.27) 8(-3.81,1.27) 9(-1.27,-1.27) 10(-1.27,1.27) 11(1.27,-1.27) 12(1.27,1.27) 13(3.81,-1.27) 14(3.81,1.27) 15(6.35,-1.27) 16(6.35,1.27) 17(8.86,-1.27) 18(8.89,1.27) 19(11.43,-1.27) 20(11.43,1.27)
  silkscreen extent -16.64,-5.08 16.64,4.44, body extent -16.6,-4.44 16.6,4.45, height 9
LED_0603 [mm]
  rect 0.8x0.8 smd: 1(-0.75,0) 2(0.75,0)
  silkscreen extent -1.3,-0.5 1.3,0.5, body extent -0.8,-0.36 0.85,0.36, height 0.68
RC_0603_SMALL [mm]
  rect 0.8x0.8 smd: 1(-0.8,0) 2(0.8,0)
  silkscreen extent -1.35,-0.5 1.35,0.5, body extent -2.21,-0.4 0.8,1.27, height 0.3
Res_3266W [mm]
  rect 1.5x1.5 hole 0.8: 1(0,0)
  round 1.5 hole 0.8: 2(2.54,-2.54) 3(5.08,0)
  silkscreen extent -1.27,-3.81 6.35,1.27, body extent -1.27,-3.81 6.35,1.27, height 8.2
SOIC-14 [mm]
  rect 2.5x0.7 smd: 1(-2.45,3.81) 2(-2.45,2.54) 3(-2.45,1.27) 4(-2.45,0) 5(-2.45,-1.27) 6(-2.45,-2.54) 7(-2.45,-3.81) 8(2.45,-3.81) 9(2.45,-2.54) 10(2.45,-1.27) 11(2.45,0) 12(2.45,1.27) 13(2.45,2.54) 14(2.45,3.81)
  silkscreen extent -2.58,-4.4 0.8,4.83, body extent -3.13,-4.38 3.07,4.38, height 1.75
TSSOP-24 [mm]
  rect 2x0.35 smd: 1(-2.9,3.575) 2(-2.9,2.925) 3(-2.9,2.275) 4(-2.9,1.625) 5(-2.9,0.975) 6(-2.9,0.325) 7(-2.9,-0.325) 8(-2.9,-0.975) 9(-2.9,-1.625) 10(-2.9,-2.275) 11(-2.9,-2.925) 12(-2.9,-3.575) 13(2.9,-3.575) 14(2.9,-2.925) 15(2.9,-2.275) 16(2.9,-1.625) 17(2.9,-0.975) 18(2.9,-0.325) 19(2.9,0.325) 20(2.9,0.975) 21(2.9,1.625) 22(2.9,2.275) 23(2.9,2.925) 24(2.9,3.575)
  silkscreen extent -3.02,-3.95 1.5,4.42, body extent -3.2,-3.95 3.2,3.95, height 1.1

## Part data
C1 C2 C3 C4 C5 C6 C7 C8 C9 C10 C11 C12 C13 C14 C15 C16: library part C
DA1 DA2: library part TLC374
DA3 DA4 DA5 DA6 DA7 DA8: library part 74HCT4067
R1 R2 R3 R4 R6 R7 R8 R9 R10 R11 R12 R13 R14 R15 R16 R17 R18 R19 R20 R21 R22 R23 R24 R25 R26 R27 R28 R29 R30 R31 R32 R33 R34 R35 R36 R37 R38 R39 R40 R41 R42 R43 R44 R45 R46 R47 R48 R49 R50 R51 R52 R53 R54 R55 R56 R57 R58 R59 R60 R61 R62 R63 R64 R65 R66 R67 R68 R69 R70 R71 R72 R73 R74 R75 R76 R77 R78 R79 R80 R81 R82 R83 R84 R85 R86 R87 R88 R89 R90 R91 R92 R93 R94 R95 R96 R97 R98 R99 R100 R101 R102 R103 R104 R105 R106 R107 R108 R109 R110 R111 R112 R113 R114 R115 R116 R117 R118 R119 R120 R121 R122: library part R
R5: library part R_potentiometer
VT1 VT2 VT3 VT4 VT5 VT6 VT7 VT8 VT9 VT10 VT11 VT12 VT13 VT14 VT15 VT16 VT17 VT18 VT19 VT20 VT21 VT22 VT23 VT24 VT25 VT26 VT27 VT28 VT29 VT30 VT31 VT32 VT33 VT34 VT35 VT36 VT37 VT38 VT39 VT40 VT41 VT42 VT43 VT44 VT45 VT46 VT47 VT48 VT49 VT50 VT51 VT52 VT53 VT54 VT55 VT56 VT57 VT58 VT59 VT60 VT61 VT62 VT63 VT64 VT65 VT66 VT67 VT68 VT69 VT70 VT71 VT72 VT73 VT74 VT75 VT76 VT77 VT78 VT79 VT80 VT81 VT82 VT83 VT84 VT85 VT86 VT87 VT88 VT89 VT90 VT91 VT92 VT93 VT94 VT95 VT96: library part phototransistor
XP1: library part XT_IDC-20SM

## Free pads (board coordinates)
  round 1.5 hole 0.8: 0(67,53.9) 1(71.8,58.8) 2(76.5,52.8) 3(67.1,84.1) 4(83.1,84.1) 5(99.1,84) 6(115.1,84.1) 7(131.1,84) 8(147.1,84) 11(60,52.6) 12(150.9,58.4) 13(154.2,58.4)
  round 3.2 hole 3.2 unplated: M0(53.5,53.5) M1(53.5,85) M2(157.7,53.5) M3(157.7,85)

## Via types
v1: diameter 0.8, hole 0.4, Top Layer to Bottom Layer, tented both sides, 387 vias
v2: diameter 0.8, hole 0.4, Top Layer to Bottom Layer, tented top, 96 vias

## Nets (pads, with @x,y where several pads share a name; then routed paths per layer and width w, separated by ;. In a path a pad name is that pad's centre, name@x,y a point inside that pad or via, vN(x,y) a via of type N, cw(c..) or ccw(c..) an arc to the next point about the centre after c; other vN are vias at no path point)
GND: C1.1 C2.1 C3.1 C4.1 C5.1 C6.1 C7.1 C8.1 C9.1 C10.1 C11.1 C12.1 C13.1 C14.1 C15.1 C16.1 DA1.12 DA2.12 DA3.12 DA3.15 DA4.12 DA4.15 DA5.12 DA5.15 DA6.12 DA6.15 DA7.12 DA7.15 DA8.12 DA8.15 pad.11 pad.12 R1.1 R3.1 R6.2 R21.1 R22.1 R23.1 R24.1 R25.1 R26.1 R27.1 R28.1 R29.1 R30.1 R31.1 R32.1 R33.1 R35.1 R36.1 R37.1 R38.1 R39.1 R40.1 R41.1 R42.1 R43.1 R44.1 R45.1 R46.1 R47.1 R48.1 R49.1 R50.1 R52.1 R53.1 R54.1 R55.1 R56.1 R57.1 R58.1 R59.1 R60.1 R61.1 R62.1 R63.1 R64.1 R65.1 R66.1 R67.1 R69.1 R70.1 R71.1 R72.1 R73.1 R74.1 R75.1 R76.1 R77.1 R78.1 R79.1 R80.1 R81.1 R82.1 R83.1 R84.1 R86.1 R87.1 R88.1 R89.1 R90.1 R91.1 R92.1 R93.1 R94.1 R95.1 R96.1 R97.1 R98.1 R99.1 R100.1 R101.1 R103.1 R104.1 R105.1 R106.1 R107.1 R108.1 R109.1 R110.1 R111.1 R112.1 R113.1 R114.1 R115.1 R116.1 R117.1 R118.1 R120.1 R121.1 R122.1 XP1.20
  other v1: 70.95,50.65 51.4,51 57.7,51 62.2,51 66.375,51.125 160,51.275 154.8,51.475 77.3,51.6 81.425,51.85 150.275,51.9 78.65,51.925 148.925,52.9 102.425,53.575 97.975,53.8 80.925,54 99.9,54 82.575,54.075 84.775,54.125 136.325,54.125 79.175,54.15 131.025,54.175 134.325,54.2 57.7,54.4 62.1,54.4 88.975,54.425 152.95,54.55 76.025,54.6 150.175,54.8 140.6,55.15 110.55,55.275 128.05,55.275 113.15,55.3 123.275,55.3 107.975,55.325 118.2,55.325 125.975,55.325 120.675,55.375 115.7,55.425 105.625,55.45 101.525,55.725 97.9,55.775 130.975,56.125 159.825,56.65 156.325,56.675 149.3,56.75 132.9,57.05 128.95,57.125 152.725,57.325 51.45,57.55 93.725,57.55 62.05,57.575 57.675,57.6 66.3,57.6 110.6,57.875 145.85,57.95 78.6,58.45 75.125,58.6 69.7,58.65 108.55,58.9 111.975,58.925 136.425,59.075 130.475,59.1 123.3,59.15 141.575,59.175 127.2,59.2 84.55,59.275 89.675,59.425 152.975,59.9 150.2,59.975 86.7,60.075 159.55,60.6 156.275,60.675 150.2,61.725 64.525,62.4 96.45,62.425 80.375,62.475 112.4,62.475 128.325,62.475 57,62.5 144.375,62.5 51.4,62.7 150.25,63.325 70.425,63.4 102.375,63.45 86.4,63.475 134.275,63.475 138.35,63.625 105.2,63.9 119.575,63.925 73.6,64.175 89.475,64.275 122.25,64.475 153.025,64.55 81.65,64.7 157.2,64.8 159.525,65 113.675,65.075 97.75,65.15 65.625,65.325 145.6,65.375 137.6,66.2 129.675,66.275 105.6,66.3 89.55,66.525 121.625,66.575 65.6,67.525 73.6,67.525 97.725,67.55 81.625,67.6 113.675,67.675 145.6,67.725 129.675,67.925 51.45,68.3 56.2,68.4 153.8,68.6 157.2,69 159.5,69.1 105.575,69.4 89.5,69.6 121.6,69.6 137.6,69.7 112.775,69.725 144.95,69.725 96.675,69.75 64.75,69.85 80.875,69.85 128.725,69.925 99.2,70.075 83.3,70.125 147.275,70.15 67.35,70.175 115.35,70.175 131.35,70.2 127.25,70.425 79.25,70.55 63.275,70.575 95.275,70.625 143.25,70.675 111.35,70.75 73.6,71.9 137.575,72.2 105.625,72.275 56.2,72.3 154,72.3 121.55,72.4 81.625,72.55 145.575,72.55 97.625,72.575 113.625,72.575 65.625,72.6 129.65,72.625 157.2,72.9 159.525,72.975 51.6,73.1 154.3,75.6 157.2,77 159.7,77 51.5,77.7 56.2,77.8 154.3,77.9 154.3,81.2 157.2,81.4 159.7,81.4 51.5,81.9 56.1,81.9 84.8,83.2 68.9,83.3 81.5,83.3 97.2,83.3 106.6,83.3 149.3,83.3 154,83.3 73.6,83.4 77.9,83.4 90.3,83.4 113.3,83.4 134.7,83.4 145.3,83.4 151.1,83.4 59,83.5 63,83.5 122.5,83.5 127,83.5 138.1,83.5 103.5,83.6 119.6,83.6 85.3,84.6 117.5,84.6 69.1,84.7 101.1,84.7 133.2,84.7 149,84.7 65.4,84.9 97.2,85 152.3,85 63,85.1 81.4,85.1 129.3,85.1 145.1,85.1 113.3,85.4 135.4,86.2 138.1,86.2 140.9,86.2 87.6,86.3 90.2,86.3 119.6,86.3 122.4,86.3 71,86.4 106.5,86.4 109.4,86.4 125.2,86.4 151,86.4 74.3,86.5 77.7,86.5 93.1,86.5 103.3,86.5 56.4,87 154.9,87 51.4,87.1 61,87.2 159.9,87.3
MUX1_OUT: DA1.11 DA3.1 R14.1 | length 34.8
  Top Layer w0.2: DA3.1@62.7,69.375 64.025,69.375 64.867,68.533 v1@64.867,63.775 ; v1(65.3,60.5) 65.972,59.828 67.193,59.828 67.493,60.128 74.172,60.128 74.7,59.6 79,59.6 81.3,57.3 83.2,57.3 84.5,56 R14.1@84.5,55.7 ; R14.1@84.5,55.3 84.525,55.275 DA1.11@86.975,55.275
  Bottom Layer w0.2: v1(64.825,63.775) 65.3,63.3 v1(65.3,60.5)
MUX2_OUT: DA1.9 DA4.1 R15.1 | length 18.3
  Top Layer w0.2: DA4.1@78.7,69.375 80.225,69.375 80.894,68.706 v1@80.894,63.775 ; v1(81.4,59.3) 83,59.3 84.485,57.815 DA1.9@86.975,57.815
  Bottom Layer w0.2: v1(80.85,63.775) 81.4,63.225 v1(81.4,59.3)
MUX3_OUT: DA1.7 DA5.1 R16.1 | length 17.6
  Top Layer w0.2: DA1.7@92.7,59.085 92.815,59.2 94.4,59.2 ; R16.1@94.4,58.5 94.4,59.2 ; DA5.1@94.7,69.375 95.825,69.375 97,68.2 v1@97,64.025 ; v1(97.4,59.2) 96.524,59.2 95.476,59.2 94.4,59.2
  Bottom Layer w0.2: v1(96.95,64.025) 97,63.975 97.359,63.975 97.4,63.934 v1(97.4,59.2)
MUX4_OUT: DA1.5 DA6.1 R17.1 | length 34.8
  Top Layer w0.2: DA1.5@91.875,56.545 94.245,56.545 95.5,57.8 99.1,57.8 101,59.7 112.8,59.7 113.2,59.3 v1(113.3,59.3) ; DA6.1@110.7,69.375 112.025,69.375 112.9,68.5 v1@112.9,64.025
  Bottom Layer w0.2: v1(112.875,64.025) 113.268,63.632 113.268,59.332 v1(113.3,59.3)
MUX5_OUT: DA2.9 DA7.1 R18.1 | length 20.2
  Top Layer w0.2: DA7.1@126.7,69.375 128.025,69.375 128.9,68.5 v1(128.9,63.775) ; v1(133.1,59) 135.1,59 136.21,57.89 DA2.9@138.6,57.89
  Bottom Layer w0.2: v1(128.9,63.775) 129.333,63.342 129.333,62.012 132.344,59 v1(133.1,59)
MUX6_OUT: DA2.7 DA8.1 R19.1 | length 15.1
  Top Layer w0.2: DA8.1@142.7,69.375 144.025,69.375 144.875,68.525 144.875,64.2 v1@144.7,64.025 ; DA2.7@143.5,59.16 R19.1@145.94,59.16 ; v1(145.2,60.2) 145.2,59.9 R19.1@145.94,59.16 ; R19.1@146,59.1 R19.1@145.94,59.16
  Bottom Layer w0.2: v1(144.85,64.125) 145.2,63.775 145.2,60.346 v1@145.127,60.273 ; v1@145.054,60.2 v1(145.2,60.2)
NetC1_2: C1.2 pad.1 R4.1 R5.2 | length 10.5
  Top Layer w0.4: pad.1@71.835,58.765 R5.2@71.835,56.565 77.465,56.565 C1.2@77.6,56.7 79.8,56.7 R4.1@80,56.9
NetDA1_1: DA1.1 R7.2 XP1.5 | length 26.2
  Top Layer w0.2: v1(89.8,52.7) 89.8,52.2 90.535,51.465 DA1.1@91.875,51.465 ; DA1.1@91.885,51.475 R7.2@94.4,51.475
  Bottom Layer w0.2: v1(89.8,52.7) 90.7,51.8 107.12,51.8 XP1.5@109.35,54.03
NetDA1_2: DA1.2 R9.2 XP1.3 | length 24
  Top Layer w0.2: v1(89.8,53.8) 90.865,52.735 DA1.2@91.875,52.735 94.235,52.735 R9.2@94.4,52.9
  Bottom Layer w0.2: v1(89.8,53.8) 91.4,52.2 105.7,52.2 106.81,53.31 XP1.3@106.81,54.03
NetDA1_4: DA1.4 DA1.6 DA1.8 DA1.10 DA2.4 DA2.6 DA2.8 DA2.10 R4.2 | length 102.3
  Top Layer w0.2: v1@80,51.4 R4.2@80,55.3 81.3,56.6 v1@83.1,56.6 ; v1@80,51.4 v1(80,51.5) ; v1(85,56.6) 85,56.8 85.255,56.545 DA1.10@86.975,56.545 89.395,56.545 ; DA1.8@86.975,59.085 88.64,59.085 89.4,58.325 89.4,57.825 ; 89.4,56.54 89.4,55.825 89.95,55.275 DA1.4@91.875,55.275 ; 89.4,56.545 89.4,57.825 ; DA1.6@91.875,57.815 89.41,57.815 89.4,57.825 ; v1(133,51.6) 133,55.8 133.82,56.62 DA2.10@138.6,56.62 140.92,56.62 140.94,56.6 ; DA2.8@138.6,59.16 140.54,59.16 141,58.7 141,56.6 ; 141,56.54 141,55.9 141.55,55.35 DA2.4@143.5,55.35 ; 141.01,57.89 DA2.6@143.5,57.89
  Bottom Layer w0.2: v1(80,51.5) 80,51.4 80.8,50.6 132,50.6 v1(133,51.6) ; v1(82.9,56.6) 84.7,56.6 85,56.9 85.1,56.9 85,56.8 v1(85,56.6)
NetDA1_13: DA1.13 R13.2 XP1.7 | length 29.1
  Top Layer w0.2: R13.2@84.5,52.9 84.665,52.735 DA1.13@86.975,52.735 88.665,52.735 v1(88.7,52.7)
  Bottom Layer w0.2: v1(88.7,52.7) 90,51.4 109.23,51.4 XP1.7@111.86,54.03
NetDA1_14: DA1.14 R11.2 XP1.9 | length 31.5
  Top Layer w0.2: R11.2@84.5,51.475 88.675,51.475 v1(88.7,51.5)
  Bottom Layer w0.2: v1(88.7,51.5) 89.2,51 111.6,51 XP1.9@114.53,53.93
NetDA2_1: DA2.1 R8.2 XP1.11 | length 31.7
  Top Layer w0.2: v1(141.8,51.6) 141.86,51.54 DA2.1@143.5,51.54 R8.2@145.94,51.54
  Bottom Layer w0.2: XP1.11@116.97,54.03 119.8,51.2 131.4,51.2 132.6,52.4 133.4,52.4 135.1,50.7 140.9,50.7 v1(141.8,51.6)
NetDA2_2: DA2.2 R10.2 XP1.13 | length 29.5
  Top Layer w0.2: v1(141.72,52.8) 141.71,52.81 DA2.2@143.5,52.81 145.71,52.81 R10.2@146,53.1
  Bottom Layer w0.2: XP1.13@119.51,54.03 120.65,52.89 120.65,52.85 121.9,51.6 131.234,51.6 132.434,52.8 133.566,52.8 135.166,51.2 140.12,51.2 v1(141.72,52.8)
NetDA2_9: DA2.5 R1.2 | length 2.4
  Top Layer w0.2: DA2.5@143.5,56.62 R1.2@145.92,56.62
NetDA2_11: DA2.11 R3.2 | length 2.5
  Top Layer w0.2: R3.2@136.15,55.35 DA2.11@138.6,55.35
NetDA2_13: DA2.13 R20.2 XP1.17 | length 24.2
  Top Layer w0.2: R20.2@136.1,53 136.29,52.81 DA2.13@138.6,52.81 139.61,52.81 140.8,54 v1(140.7,54)
  Bottom Layer w0.2: XP1.17@124.56,54.03 126.19,52.4 130.903,52.4 132.103,53.6 133.897,53.6 135.497,52 138.7,52 v1(140.7,54)
NetDA2_14: DA2.14 R12.2 XP1.15 | length 26.4
  Top Layer w0.2: R12.2@136.1,51.6 136.16,51.54 DA2.14@138.6,51.54 139.64,51.54 140.7,52.6 v1(140.7,52.8)
  Bottom Layer w0.2: XP1.15@122.05,54.03 124.08,52 131.069,52 132.269,53.2 133.731,53.2 135.331,51.6 139.5,51.6 v1(140.7,52.8)
NetR2_2: pad.2 R2.2 R5.1 | length 4.3
  Top Layer w0.4: R2.2@74.4,51.8 74.4,52.8 ; R5.1@74.4,54 74.4,52.8 ; pad.2@76.5,52.8 74.4,52.8
NetR5_3: pad.0 R5.3 R6.1 | length 4.6
  Top Layer w0.4: pad.0@67,53.9 67.125,54.025 R5.3@69.295,54.025 ; R6.1@69.3,51.8 R5.3@69.3,54.02
NetR14_2: R14.2 XP1.1 | length 24.9
  Top Layer w0.2: v1(82,55.3) R14.2@82.9,55.3
  Bottom Layer w0.2: v1(82,55.3) 89.4,55.3 92.1,52.6 102.84,52.6 XP1.1@104.27,54.03
NetR15_2: R15.2 XP1.2 | length 26.7
  Top Layer w0.2: v1(82,58) R15.2@82.9,58
  Bottom Layer w0.2: v1(82,58) 87.266,58 92.266,53 100.1,53 103.67,56.57 XP1.2@104.27,56.57
NetR16_2: R16.2 XP1.6 | length 14.8
  Top Layer w0.2: R16.2@96,58.8 96.5,58.3 98.9,58.3 98.9,58.5 v1(98.8,58.6) ; v1(101,58.5) 107.42,58.5 XP1.6@109.35,56.57
  Bottom Layer w0.2: v1(98.8,58.6) 100.8,58.6 100.9,58.5 v1(101,58.5)
NetR17_2: R17.2 XP1.4 | length 12
  Top Layer w0.2: R17.2@96,56.6 102.2,56.6 103.6,58 105.38,58 XP1.4@106.81,56.57
NetR18_2: R18.2 XP1.18 | length 10.5
  Top Layer w0.2: XP1.18@124.59,56.57 125.92,57.9 R18.2@134.5,57.9
NetR19_2: R19.2 XP1.16 | length 29.3
  Top Layer w0.2: XP1.16@122.05,56.57 123.78,58.3 131,58.3 132.6,59.9 142.7,59.9 v1(143,60.2) ; R19.2@147.6,59.1 v1(148.5,59.1)
  Bottom Layer w0.2: v1(143,60.2) 144.1,59.1 v1(148.5,59.1)
P1: DA3.9 R21.2 VT2.2 | length 20.3
  Top Layer w0.2: R21.2@58.1,74.6 v2(58.1,73.6) 58.6,73.1 58.6,66.2 60.625,64.175 DA3.9@62.7,64.175 ; v1(58.1,79.4) VT2.2@58.1,80.35
  Bottom Layer w0.2: v2(58.1,73.6) v1(58.1,79.4)
P2: DA3.8 R24.2 VT4.2 | length 19
  Top Layer w0.2: v2@59,73.5 59,66.7 60.875,64.825 DA3.8@62.7,64.825 ; v2(59.1,73.6) R24.2@59.1,74.6 ; v1(59.1,79.4) VT4.2@59.1,80.35
  Bottom Layer w0.2: v2(59.1,73.6) v1(59.1,79.4)